# Altium PCB MainBoard.PcbDoc
Units mm, origin at the board's own origin, x right, y up, seen from the top; angles counter-clockwise.
Board outline 90 x 60 mm, 2 copper layers (Top Layer, Bottom Layer); 40 components, 36 nets, 182 pads, 27 vias.
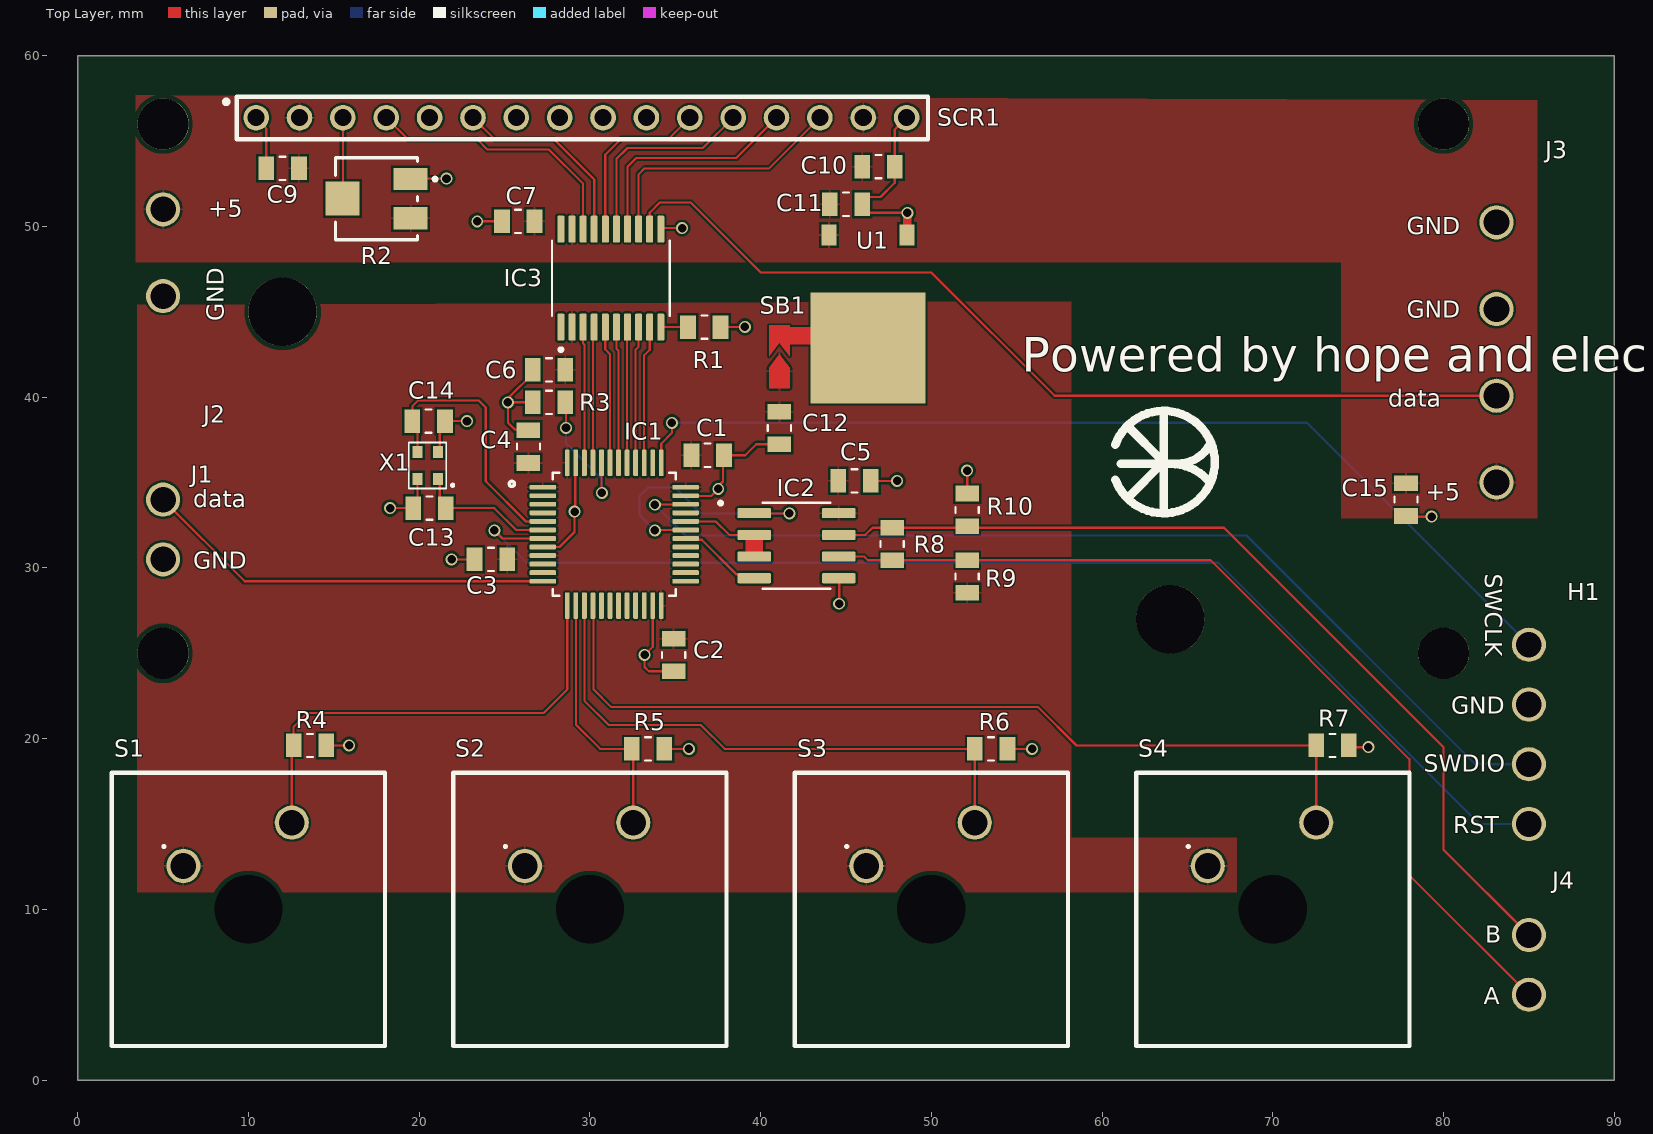
[diagram p0: Top Layer view]
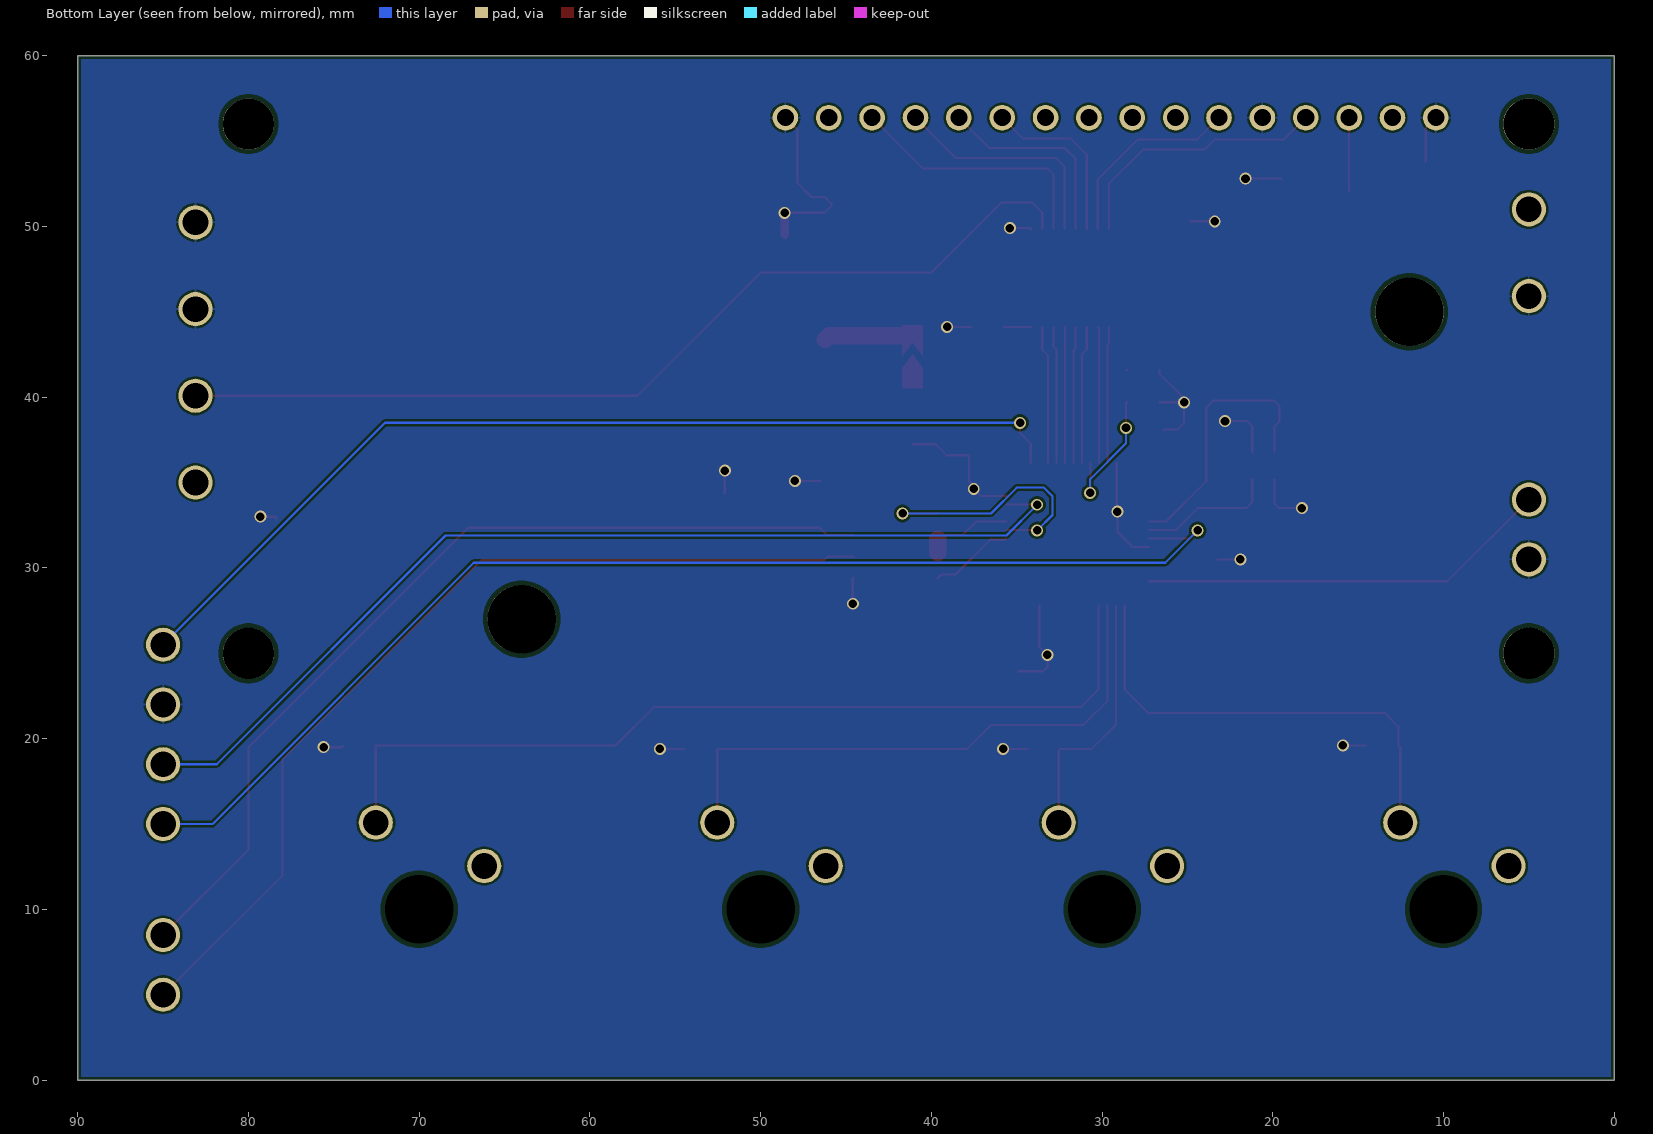
[diagram p1: Bottom Layer view, seen from below]
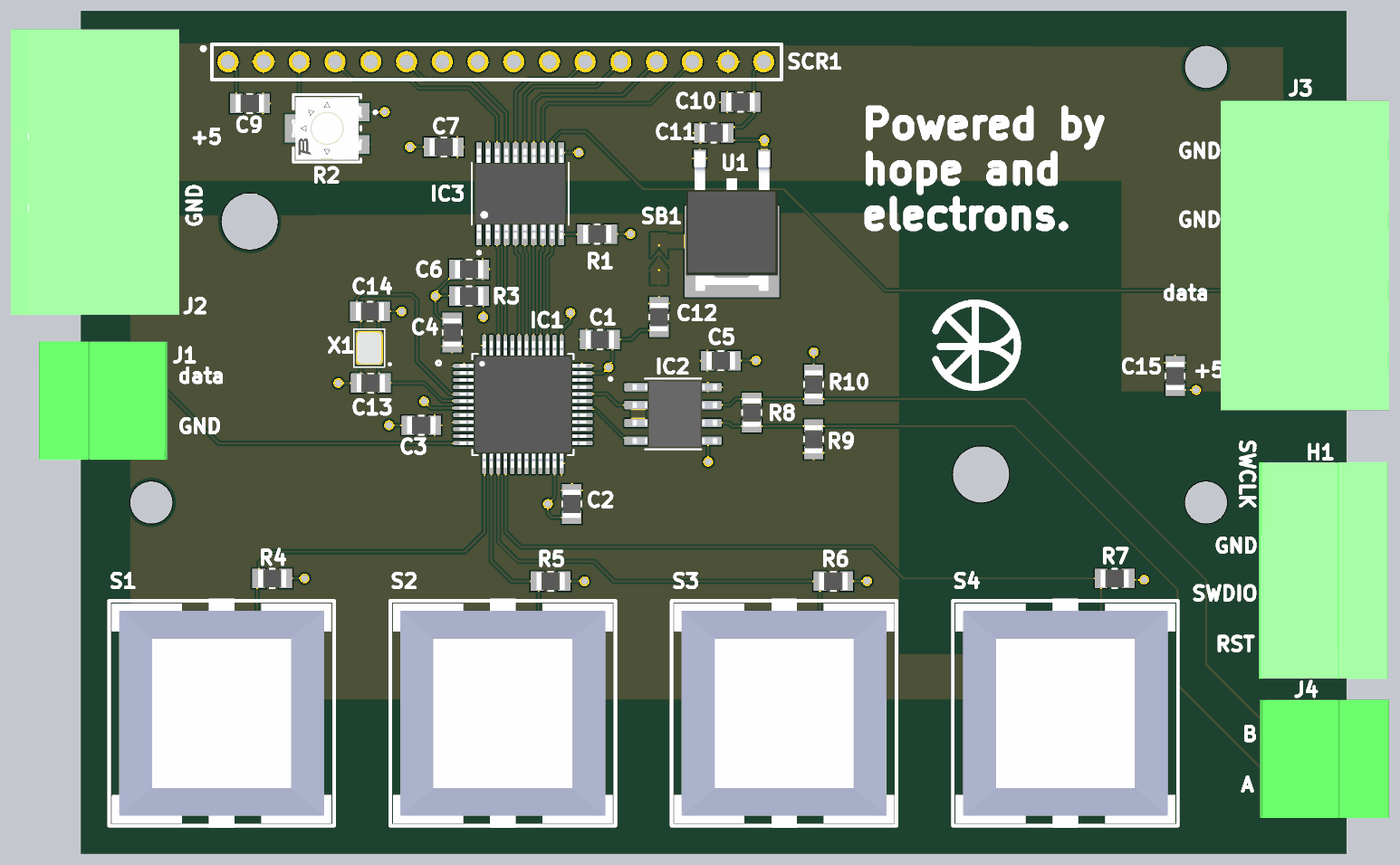
[diagram p2: 3D render of the assembled board from above, using the file's embedded part models]

## Layer stack, top to bottom
Top Solder: solder mask 0.0102, Solder Resist, Dk 3.5
Top Layer: signal copper 0.0356
Dielectric 1: dielectric 0.32, FR-4, Dk 4.8
Bottom Layer: signal copper 0.0356
Bottom Solder: solder mask 0.0102, Solder Resist, Dk 3.5

## Board outline
0,60 0,0 90,0 90,60

## Design rules (kind name [scope] priority, off if disabled: settings)
BoardOutlineClearance [All] p1: gap=0.2 ignorepadtopadclearanceinfootprint=FALSE
Clearance [All] p1: gap=0.127 ignorepadtopadclearanceinfootprint=FALSE except(0.25: Arc-Hole Track-Hole SMDPad-Hole THPad-Hole Via-Hole Fill-Hole Poly-Hole Region-Hole Text-Hole)
ComponentClearance [All] p1: gap=0.127 collisioncheckmode=3 verticalgap=0.127 showdistances=TRUE
DiffPairsRouting [All] p1: maxlimit=0.254 minlimit=0.127 mostfreqgap=0.127 toplayer_minwidth=0.127 toplayer_maxwidth=25.4 toplayer_prefwidth=0.127 bottomlayer_minwidth=0.127 bottomlayer_maxwidth=25.4 bottomlayer_prefwidth=0.127 maxuncoupledlength=12.7
Height [All] p1: minheight=0 maxheight=1816.048 prefheight=12.7
HoleSize [All] p1: absolutevalues=TRUE maxlimit=6.3 minlimit=0.3 maxpercent=80.000 minpercent=20.000
HoleToHoleClearance [All] p1: gap=0.25 allowstackedmicrovias=FALSE
MinimumAnnularRing [All] p1: minimumring=0.076
MinimumSolderMaskSliver [All] p1: minsoldermaskwidth=0
PlaneClearance [All] p1: clearance=0.127
PlaneConnect PlaneConnectPowerPads [InPadClass('PowerPads')] p1: planeconnectstyle=Direct reliefexpansion=0.508 reliefentries=4 reliefconductorwidth=0.254 reliefairgap=0.254
PlaneConnect [All] p2: pad.planeconnectstyle=Relief pad.reliefexpansion=0.3 pad.reliefentries=4 pad.reliefconductorwidth=0.127 pad.reliefairgap=0.127 via.planeconnectstyle=Direct via.reliefexpansion=0.3 via.reliefentries=4 via.reliefconductorwidth=0.127 via.reliefairgap=0.127
PolygonConnect PolygonConnectPowerPads [All vs (InPadClass('PowerPads'))] p1: connectstyle=Direct reliefconductorwidth=0.254 reliefentries=4 polygonreliefangle="90 Angle" airgapwidth=0.254
PolygonConnect [All] p2: thpad.connectstyle=Relief thpad.reliefconductorwidth=0.127 thpad.reliefentries=4 thpad.polygonreliefangle="90 Angle" thpad.airgapwidth=0.127 smdpad.connectstyle=Relief smdpad.reliefconductorwidth=0.127 smdpad.reliefentries=4 smdpad.polygonreliefangle="90 Angle" smdpad.airgapwidth=0.127 via.connectstyle=Direct via.reliefconductorwidth=0.127 via.reliefentries=4 via.polygonreliefangle="90 Angle" via.airgapwidth=0.127
RoutingVias [All] p1: holewidth=0.3 width=0.6 viastyle="Through Hole" minholewidth=0.3 minwidth=0.6 maxholewidth=0.6 maxwidth=6.6
SilkToSilkClearance [All] p1: silktosilkclearance=0
SilkToSolderMaskClearance [IsPad] p1: minsilkscreentomaskgap=0.127 clearancetoexposedcopper=TRUE
SolderMaskExpansion [All] p1: expansion=0.075 istentingtop=FALSE
SupplyNets "Schematic Supply Nets_2" [InNet('+5')] p1: voltage=0.000
SupplyNets "Schematic Supply Nets_1" [InNet('+3v3')] p2: voltage=0.000
SupplyNets "Schematic Supply Nets" [InNet('GND')] p3: voltage=0.000
Width [All] p1: maxlimit=25.4 minlimit=0.127 preferedwidth=0.127 minimp=50.000000 maximp=50.000000 favimp=50.000000
20 further rules are at their usual default settings.

## Classes and differential pairs
component class U_STM32: C1 C2 C3 C4 C13 C14 IC1 R3 X1
component class U_ST-Link_V2: H1
component class U_SCREEN+SWITCH: C9 C10 R2 R4 R5 R6 R7 S1 S2 S3 S4 SCR1
component class U_others: C11 C12 J1 J2 SB1 U1
component class U_MAX3485+TXB0108PWR: C5 C6 C7 C15 IC2 IC3 J3 J4 R1 R8 R9 R10

## Components (designator, comment, footprint, x,y, rotation, side; value= is the part's Value field where it differs from the comment)
C1 "100n" 0805 36.9,36.6 r0 top
C2 "100n" 0805 34.9,24.9 r270 top
C3 "100n" 0805 24.2,30.5 r180 top
C4 "100n" 0805 26.4,37.1 r90 top
C5 "100n" 0805 45.5,35.1 r0 top
C6 "100n" 0805 27.6,41.6 r180 top
C7 "100n" 0805 25.8,50.3 r180 top
C9 "100n" 0805 12,53.4 r180 top
C10 "100n" 0805 46.9,53.5 r0 top
C11 "10u" 0805 45,51.3 r0 top
C12 "10u" 0805 41.1,38.2 r270 top
C13 "14pf" 0805 20.6,33.5 r0 top
C14 "14pf" 0805 20.555,38.6 r180 top
C15 "100n" 0805 77.8,34 r270 top
H1 "ST-Link_V2" 4pin 85,15 r90 top
IC1 "STM32" STM32 31.3,32.1 r0 top
IC2 "MAX3485" MAX3485 42.1,31.3 r0 top
IC3 "TXB0108PWR" TXB0108PWR 31.1,47.1 r90 top
J1 "SSR" 2pin 5,34 r270 top
J2 "2pin_jumpers" 2pinpwd 5,51 r270 top
J3 "WS2812" 4pinpwd 83.1,35 r90 top
J4 "rs485" 2pin 85,5 r90 top
R1 "10k" 0805 36.7,44.1 r0 top
R2 "10k" potentiometer 17.5,51.5 r90 top
R3 "10k" 0805 27.6,39.7 r0 top
R4 "resistor" 0805 13.6,19.6 r0 top
R5 "10K" 0805 33.4,19.4 r0 top
R6 "10K" 0805 53.5,19.4 r0 top
R7 "10K" 0805 73.5,19.6 r0 top
R8 "120" 0805 47.7,31.4 r270 top
R9 "10k" 0805 52.1,29.5 r90 top
R10 "10k" 0805 52.1,33.4 r90 top
S1 "SWITCH" SWITCh 10,10 r0 top
S2 "SWITCH" SWITCh 30,10 r0 top
S3 "SWITCH" SWITCh 50,10 r0 top
S4 "SWITCH" SWITCh 70,10 r0 top
SB1 "SolderBrige" SolderBrige 42.624,40.887 r270 top
SCR1 "SCREEN" SCREEN 29.5,56.5 r0 top
U1 "LM1117DT-3.3" LM1117DT-3.3 46.286,42.871 r180 top
X1 "crystal" crystal 21.1,35.2 r90 top

## Footprints (in the part's own frame and the unit in brackets; to place one, negate y for a bottom-side part, rotate by r counter-clockwise, add the part's x,y. Pads: shape width x height; smd on the part's side, far side on the other; paste and mask are expansions set on the pad)
2pin [mm]
  round 2 hole 1.5: 1(0,0) 2(3.5,0)
  body extent -2.45,-8 5.95,1.2, height 7.25
2pinpwd [mm]
  round 2 hole 1.5: 1(0,0) 2(5.08,0)
  body extent -7.66,-10 12.66,2, height 8.6
4pin [mm]
  round 2 hole 1.5: 1(0,0) 2(3.5,0) 3(7,0) 4(10.5,0)
  body extent -2.54,-7.94 12.86,1.26, height 7.25
4pinpwd [mm]
  round 2 hole 1.5: 1(0,0) 2(5.08,0) 3(10.16,0) 4(15.24,0)
  body extent -3.43,-9.93 18.57,2.07, height 9.3
0805 [mm]
  rect 0.92x1.38 smd: 1(-0.955,0) 2(0.955,0)
  silkscreen extent -0.17,-0.68 0.17,0.68, body extent -1,-0.63 1,0.63, height 0.6
crystal [mm]
  rect 0.7x0.6 smd: 1(0,0) 2(1.6,0) 3(1.6,1.2) 4(0,1.2)
  silkscreen extent -0.55,-0.91 2.15,1.71, body extent -0.45,-0.4 2.05,1.6, height 0.55
LM1117DT-3.3 [mil]
  rect 35x48 smd: 1(-90,-261) 3(90,-261)
  rect 265x256 smd: 4(0,0)
  body extent -129,-280 129,110, height 106
MAX3485 [mm]
  rrect25% 1.97x0.59 smd: 1(-2.475,1.905) 2(-2.475,0.635) 3(-2.475,-0.635) 4(-2.475,-1.905) 5(2.475,-1.905) 6(2.475,-0.635) 7(2.475,0.635) 8(2.475,1.905)
  silkscreen extent -4.54,-2.52 2,2.59, body extent -2.87,-2.45 3.13,2.45, height 1.75
potentiometer [mm]
  rect 1.3x2 smd paste+0 mask+0: 1(1.277,-2) 3(-1.023,-2)
  rect 2x2 smd paste+0 mask+0: 2(0.127,2)
  silkscreen extent -2.27,-3.43 2.53,2.4, body extent -2.37,-3.1 2.63,3.1, height 0.25
SCREEN [mm]
  round 1.5 hole 1 paste-2539.97: 1(-19.05,-0.127) 2(-16.51,-0.127) 3(-13.97,-0.127) 4(-11.43,-0.127) 5(-8.89,-0.127) 6(-6.35,-0.127) 7(-3.81,-0.127) 8(-1.27,-0.127) 9(1.27,-0.127) 10(3.81,-0.127) 11(6.35,-0.127) 12(8.89,-0.127) 13(11.43,-0.127) 14(13.97,-0.127) 15(16.51,-0.127) 16(19.05,-0.127)
  silkscreen extent -20.19,-1.4 20.31,1.1
SolderBrige [mil]
  round 1 smd: 1(-25,-60) 2(-95,-60)
  Top Layer region: -64.37,-60 -32.87,-83.62 14.37,-83.62 14.37,-36.38 -32.87,-36.38
  Top Layer region: -130.43,-83.62 -130.43,-36.38 -59.57,-36.38 -91.06,-60 -59.57,-83.62
STM32 [mm]
  rrect50% 1.56x0.28 smd: 1(-4.053,2.623) 2(-4.053,2.123) 3(-4.053,1.623) 4(-4.053,1.123) 5(-4.053,0.623) 6(-4.053,0.123) 7(-4.053,-0.377) 8(-4.053,-0.877) 9(-4.053,-1.377) 10(-4.053,-1.877) 11(-4.053,-2.377) 12(-4.053,-2.877) 25(4.307,-2.877) 26(4.307,-2.377) 27(4.307,-1.877) 28(4.307,-1.377) 29(4.307,-0.877) 30(4.307,-0.377) 31(4.307,0.123) 32(4.307,0.623) 33(4.307,1.123) 34(4.307,1.623) 35(4.307,2.123) 36(4.307,2.623)
  rrect50% 0.28x1.56 smd: 13(-2.623,-4.307) 14(-2.123,-4.307) 15(-1.623,-4.307) 16(-1.123,-4.307) 17(-0.623,-4.307) 18(-0.123,-4.307) 19(0.377,-4.307) 20(0.877,-4.307) 21(1.377,-4.307) 22(1.877,-4.307) 23(2.377,-4.307) 24(2.877,-4.307) 37(2.877,4.053) 38(2.377,4.053) 39(1.877,4.053) 40(1.377,4.053) 41(0.877,4.053) 42(0.377,4.053) 43(-0.123,4.053) 44(-0.623,4.053) 45(-1.123,4.053) 46(-1.623,4.053) 47(-2.123,4.053) 48(-2.623,4.053)
  silkscreen extent -6.02,-3.73 3.73,3.47, body extent -4.37,-4.63 4.63,4.37, height 1.6
SWITCh [mm]
  round 2 hole 1.5 paste-2539.97: 1(-3.81,2.54) 2(2.54,5.08)
  round 0 hole 4 unplated: 3(0,0)
  silkscreen extent -8,-8 8,8, body extent -7.82,-8.17 7.82,8.17, height 15.3
TXB0108PWR [mm]
  rrect25% 1.57x0.41 smd: 1(-2.997,2.798) 2(-2.997,2.148) 3(-2.997,1.498) 4(-2.997,0.848) 5(-2.997,0.198) 6(-2.997,-0.452) 7(-2.997,-1.102) 8(-2.997,-1.752) 9(-2.997,-2.402) 10(-2.997,-3.052) 11(2.743,-3.052) 12(2.743,-2.402) 13(2.743,-1.752) 14(2.743,-1.102) 15(2.743,-0.452) 16(2.743,0.198) 17(2.743,0.848) 18(2.743,1.498) 19(2.743,2.148) 20(2.743,2.798)
  silkscreen extent -4.42,-3.58 2.07,3.32, body extent -3.33,-3.38 3.07,3.12, height 1.2

## Part data
C1 C2 C3 C4 C5 C6 C7 C9 C10 C11 C12 C13 C14 C15: library part capacitor
R1 R3 R5 R6 R7 R8 R9 R10: library part resistor
R2: library part potentiometer

## Free pads (board coordinates)
  round 3 hole 3 unplated: 8(5,25) 8(5,56) 8(80,25) 8(80,56)
  round 4 hole 4 unplated: 9(12,45) 9(64,27)

## Via types
v1: diameter 0.7, hole 0.5, Top Layer to Bottom Layer, 27 vias

## Nets (pads, with @x,y where several pads share a name; then routed paths per layer and width w, separated by ;. In a path a pad name is that pad's centre, name@x,y a point inside that pad or via, vN(x,y) a via of type N, cw(c..) or ccw(c..) an arc to the next point about the centre after c; other vN are vias at no path point)
+3v3: C1.1 C2.1 C3.1 C4.1 C5.1 C6.1 C12.1 IC1.1 IC1.9 IC1.24 IC1.36 IC1.48 IC2.8 IC3.2 R9.1 S1.1 S2.1 S3.1 S4.1 SB1.1 | length 0
  Top Layer w0.127: C6.1@28.552,41.603 C6.1
+5: C7.1 C9.1 C10.1 C11.1 C15.1 IC3.19 J2.1 J3.1 R2.3 SCR1.2 SCR1.15 U1.3
GND: C1.2 C2.2 C3.2 C4.2 C5.2 C6.2 C7.2 C9.2 C10.2 C11.2 C12.2 C13.1 C14.1 C15.2 H1.3 IC1.8 IC1.23 IC1.35 IC1.47 IC2.5 IC3.11 J1.2 J2.2 J3.3 J3.4 R1.2 R2.1 R3.1 R4.2 R5.2 R6.2 R7.2 R10.2 SCR1.1 SCR1.5 SCR1.16 U1.1 X1.2 X1.4 | length 64.9
  Top Layer w0.127: SCR1.1 10.45,56.338 11.045,55.743 C9.2@11.045,53.8 ; R4.2 v1(15.9,19.6) ; v1(18.3,33.5) C13.1 19.9,33.755 X1.4 ; R2.1 19.523,52.8 v1(21.6,52.8) ; X1.2@21.2,36.8 21.2,38.29 C14.1 v1(22.8,38.6) ; v1(21.9,30.5) C3.2 ; v1(23.4,50.3) C7.2 ; C4.2 26.349,38.106 25.594,38.106 25.2,38.5 v1(25.2,39.7) ; R3.1 v1(25.2,39.7) ; C6.2 26.645,41.37 25.31,40.035 25.31,39.81 v1(25.2,39.7) ; IC1.8 28.223,31.223 29.1,32.1 v1(29.1,33.3) 29.139,33.339 29.139,36.115 IC1.47 ; IC1.23 33.677,25.377 v1(33.2,24.9) 33.2,24.2 33.455,23.945 C2.2 ; IC3.11@34.195,49.8 IC3.11 34.209,49.9 v1(35.4,49.9) ; R5.2 v1(35.8,19.4) ; IC1.35 35.619,34.212 37.104,34.212 v1(37.517,34.624) 37.517,34.779 37.8,35.062 37.8,36.545 C1.2 39.1,36.6 39.745,37.245 C12.2 ; R1.2 37.672,44.117 v1(39.076,44.117) ; IC2.5 44.6,29.37 v1(44.6,27.9) ; C5.2 v1(48,35.1) ; SCR1.16 47.855,55.678 C10.2 47.855,52.555 47.024,51.724 46.252,51.724 45.855,51.328 45.855,51.197 46.252,50.8 v1(48.6,50.8) ; U1.1 U1.1@48.6,49.528 ; R10.2 v1(52.1,35.7) ; R6.2 v1(55.9,19.4) ; R7.2 74.555,19.5 v1(75.6,19.5) ; C15.2@78.355,32.8 78.355,32.928 78.427,33 v1(79.3,33)
  Top Layer w0.5: U1.1@48.6,49.528 48.586,49.542 48.586,50.786 v1(48.6,50.8)
NetC13_2: C13.2 IC1.6 X1.1 | length 8.1
  Top Layer w0.127: X1.1@21.2,35.2 21.2,33.855 C13.2 24.4,33.5 25.677,32.223 IC1.6
NetC14_2: C14.2 IC1.5 X1.3 | length 16
  Top Layer w0.127: X1.3 19.9,38.3 C14.2 19.6,39.478 19.922,39.8 23.5,39.8 23.9,39.4 23.9,35.076 26.253,32.723 IC1.5
NetH1_1: H1.1 IC1.7 | length 70.8
  Top Layer w0.127: v1(24.4,32.2) 24.877,31.723 IC1.7
  Bottom Layer w0.127: v1(24.4,32.2) 26.3,30.3 66.8,30.3 82.1,15 H1.1
NetH1_2: H1.2 IC1.34 | length 59.3
  Top Layer w0.127: v1(33.8,33.7) 33.812,33.711 35.596,33.711 IC1.34
  Bottom Layer w0.127: v1(33.8,33.7) 35.6,31.9 68.459,31.9 81.859,18.5 H1.2
NetH1_4: H1.4 IC1.37 | length 58.2
  Top Layer w0.127: IC1.37 34.177,37.277 34.8,37.9 v1(34.8,38.5)
  Bottom Layer w0.127: v1(34.8,38.5) 72,38.5 H1.4
NetIC1_12: IC1.12 J1.1 | length 24.2
  Top Layer w0.127: J1.1 9.777,29.223 IC1.12
NetIC1_13: IC1.13 R4.1 S1.2 | length 27.5
  Top Layer w0.127: S1.2 12.54,19.495 R4.1 12.645,20.7 13.445,21.5 27.3,21.5 28.677,22.877 IC1.13
NetIC1_14: IC1.14 R5.1 S2.2 | length 15.2
  Top Layer w0.127: IC1.14 29.177,20.823 30.6,19.4 R5.1 32.54,19.305 S2.2
NetIC1_15: IC1.15 R6.1 S3.2 | length 33.9
  Top Layer w0.127: IC1.15 29.677,22.223 31.1,20.8 36.5,20.8 37.9,19.4 R6.1 52.54,19.395 S3.2
NetIC1_16: IC1.16 R7.1 S4.2 | length 53.1
  Top Layer w0.127: IC1.16 30.218,27.752 30.218,22.882 31.253,21.847 56.253,21.847 58.5,19.6 R7.1 72.54,19.595 S4.2
NetIC1_30: IC1.30 IC2.4 | length 5
  Top Layer w0.127: IC1.30 35.679,31.651 36.549,31.651 38.589,29.611 39.409,29.611 IC2.4
NetIC1_31: IC1.31 IC2.1 | length 15.9
  Top Layer w0.127: v1(33.8,32.2) 33.812,32.212 35.596,32.212 IC1.31 ; IC2.1 39.642,33.188 v1(41.688,33.188)
  Bottom Layer w0.127: v1(33.8,32.2) 32.9,33.1 32.9,34.2 33.4,34.7 35,34.7 36.512,33.188 v1(41.688,33.188)
NetIC1_32: IC1.32 IC2.2 IC2.3 | length 5.1
  Top Layer w0.127: IC1.32 37.377,32.723 38.165,31.935 IC2.2
  Top Layer w1: IC2.3@39.625,30.9 IC2.2@39.625,31.7
NetIC1_39: IC1.39 IC3.9 | length 8.1
  Top Layer w0.127: IC1.39 33.177,42.452 33.502,42.777 IC3.9
NetIC1_40: IC1.40 IC3.8 | length 8
  Top Layer w0.127: IC1.40 32.677,42.777 32.852,42.952 IC3.8
NetIC1_41: IC1.41 IC3.7 | length 8
  Top Layer w0.127: IC1.41 32.177,44.078 IC3.7
NetIC1_42: IC1.42 IC3.6 | length 8
  Top Layer w0.127: IC3.6 31.552,42.848 31.677,42.723 IC1.42
NetIC1_43: IC1.43 IC3.5 | length 8.1
  Top Layer w0.127: IC3.5 30.902,42.798 31.177,42.523 IC1.43
NetIC1_44: IC1.44 R3.2 | length 8
  Top Layer w0.127: R3.2 28.6,39.655 v1(28.6,38.2) ; IC1.44 30.689,36.141 30.689,34.411 v1(30.7,34.4)
  Bottom Layer w0.127: v1(28.6,38.2) 28.6,37.3 30.7,35.2 v1(30.7,34.4)
NetIC1_45: IC1.45 IC3.4 | length 8
  Top Layer w0.127: IC1.45 30.177,44.028 IC3.4
NetIC1_46: IC1.46 IC3.3 | length 8
  Top Layer w0.127: IC3.3 29.602,43.151 29.677,43.076 IC1.46
NetIC2_6: IC2.6 J4.1 R8.2 R9.2 | length 55
  Top Layer w0.127: IC2.6 46.06,30.665 46.28,30.445 R8.2 66.355,30.445 78,18.8 78,12 J4.1
NetIC2_7: IC2.7 J4.2 R8.1 R10.1 | length 54
  Top Layer w0.127: IC2.7 46.135,31.935 46.555,32.355 67.145,32.355 80,19.5 80,13.5 J4.2
NetIC3_10: IC3.10 R1.1 | length 1.6
  Top Layer w0.127: IC3.10 35.742,44.103 R1.1
NetIC3_12: IC3.12 J3.2 | length 55.5
  Top Layer w0.127: IC3.12 33.502,50.802 34.1,51.4 35.9,51.4 40,47.3 50,47.3 57.22,40.08 J3.2
NetIC3_13: IC3.13 SCR1.14 | length 15.2
  Top Layer w0.127: IC3.13 32.852,53.052 33.2,53.4 40.497,53.4 SCR1.14
NetIC3_14: IC3.14 SCR1.13 | length 13.6
  Top Layer w0.127: IC3.14 32.202,53.502 32.7,54 38.557,54 SCR1.13
NetIC3_15: IC3.15 SCR1.12 | length 11.9
  Top Layer w0.127: IC3.15 31.552,53.952 32.2,54.6 36.617,54.6 SCR1.12
NetIC3_16: IC3.16 SCR1.11 | length 10.2
  Top Layer w0.127: IC3.16 30.902,54.202 31.844,55.144 34.621,55.144 SCR1.11
NetIC3_17: IC3.17 SCR1.6 | length 11.5
  Top Layer w0.127: SCR1.6 24.423,55.1 27.9,55.1 30.252,52.748 IC3.17
NetIC3_18: IC3.18 SCR1.4 | length 15.8
  Top Layer w0.127: SCR1.4 19.343,55.1 23.4,55.1 24,54.5 27.6,54.5 29.602,52.498 IC3.18
NetR2_2: R2.2 SCR1.3 | length 4.4
  Top Layer w0.127: R2.2@15.5,52.027 15.53,52.057 SCR1.3
NetSB1_2: SB1.2 U1.4 | length 4.9
  Top Layer w1: 41.4,43.6 45.985,43.6 U1.4@46.214,43.371
pads on no net: IC1.2 IC1.3 IC1.4 IC1.10 IC1.11 IC1.17 IC1.18 IC1.19 IC1.20 IC1.21 IC1.22 IC1.25 IC1.26 IC1.27 IC1.28 IC1.29 IC1.33 IC1.38 IC3.1 IC3.20 S1.3 S2.3 S3.3 S4.3 SCR1.7 SCR1.8 SCR1.9 SCR1.10

## Polygon pours and split planes (outlines as drawn)
+3v3 on Top Layer "+3v3" (solid, pour order 4): 3.5,45.4 3.5,11 67.9,11 67.9,14.2 58.2,14.2 58.2,45.626
+5 on Top Layer "+5" (solid, pour order 3): 3.4,57.7 3.4,47.9 74,47.9 74,32.9 85.5,32.9 85.5,57.4
GND on Bottom Layer "gnd" (solid, pour order 1): -5.3,60.677 -5.3,0.56 91.168,-9.628 92.722,66.18

## Silkscreen, mask and mechanical layers (free items; w line width, h text height)
Top Overlay:
  circle w0.3: c8.7,57.3 r0.1
  lines w0.5: 60.781,35.174 ccw(c63.6,36.2) 60.781,37.226 ; 61.1,36.1 63.6,36.1 63.6,36.2 ; 61.5,34.1 63.6,36.2 ; 61.5,38.3 63.6,36.2 ; 63.5,36.1 64.4,36.1 ccw(c64.4,38.301) 66.306,37.2 ; 63.6,33.2 63.6,39.2 ; 64,36.1 cw(c64,33.1) 66.343,34.974 ; 63.6,36.2 63.6,36.2
  text "+5" at 7.654,50.554 h1
  text "GND" at 77.854,49.554 h1
  text "GND" at 77.854,44.654 h1
  text "GND" at 8.546,44.454 h1 r90
  text "Powered by hope and electrons." at 55.3,41.5 h2
  text "data" at 76.754,39.454 h1
  text "+5" at 78.954,33.954 h1
  text "data" at 6.754,33.554 h1
  text "GND" at 6.754,29.954 h1
  text "SWCLK" at 82.454,29.646 h1 r270
  text "GND" at 80.454,21.454 h1
  text "SWDIO" at 78.854,18.054 h1
  text "RST" at 80.554,14.454 h1
  text "B" at 82.454,8.054 h1
  text "A" at 82.354,4.454 h1